# Altium PCB PCB_PS7805.PcbDoc
Units mil, origin at the board's own origin, x right, y up, seen from the top; angles counter-clockwise.
Board outline 3180 x 640 mil, 2 copper layers (Top Layer, Bottom Layer); 10 components, 5 nets, 22 pads, 1 vias.
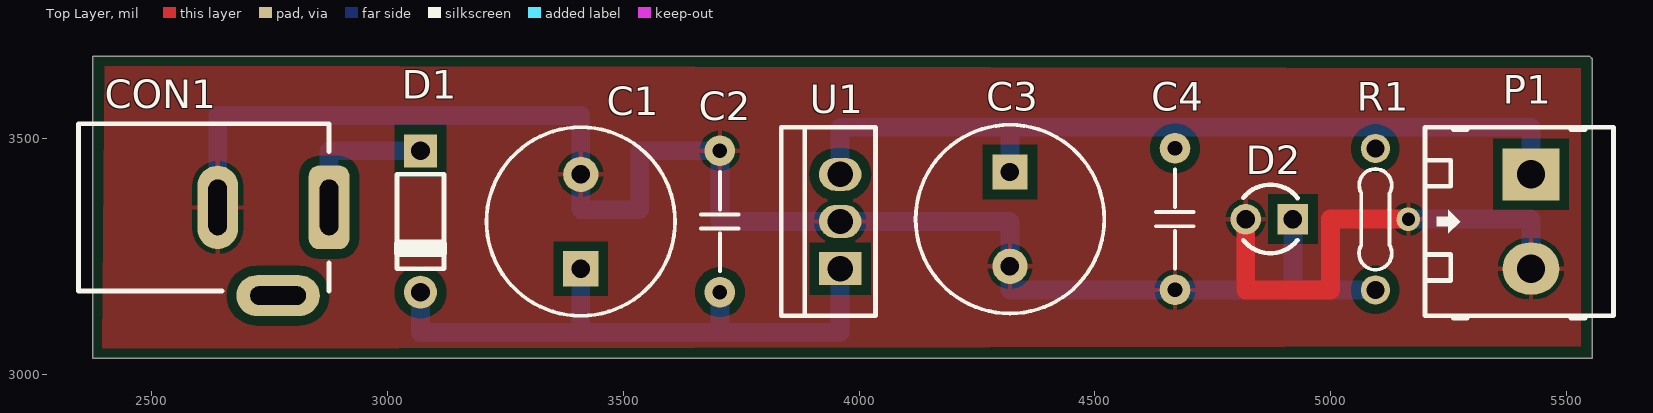
[diagram p0: Top Layer view]
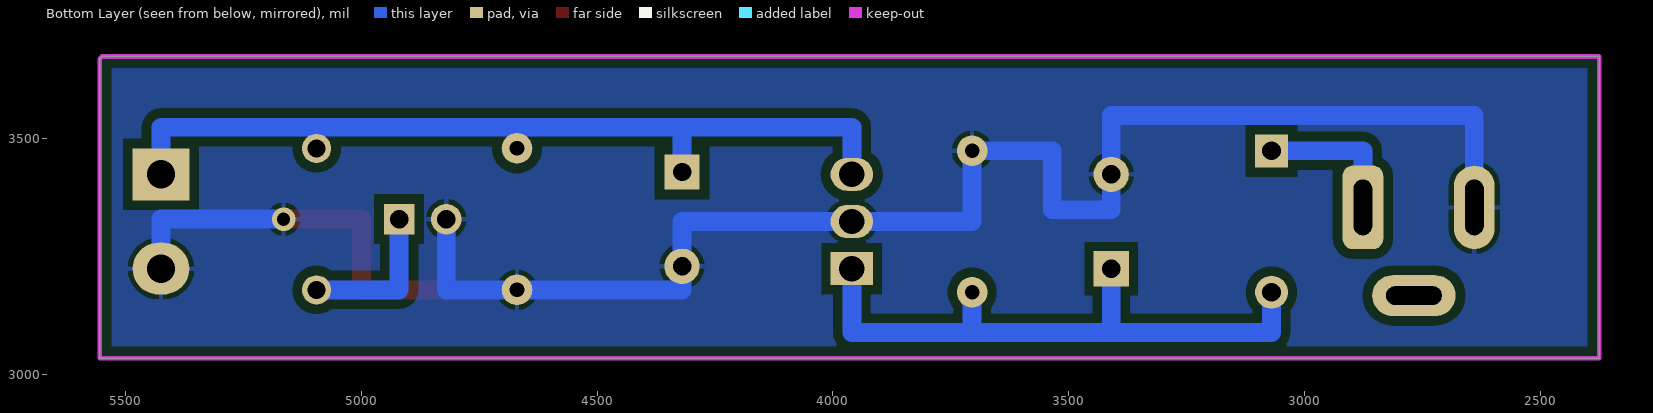
[diagram p1: Bottom Layer view, seen from below]
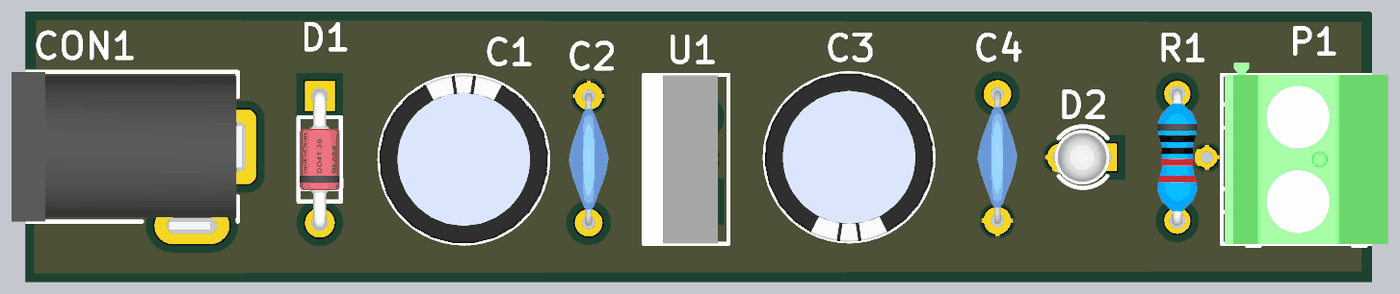
[diagram p2: 3D render of the assembled board from above, using the file's embedded part models]

## Layer stack, top to bottom
Top Solder: solder mask 0.4, Solder Resist, Dk 3.5
Top Layer: signal copper 1.4
Dielectric 1: dielectric 12.6, FR-4, Dk 4.8
Bottom Layer: signal copper 1.4
Bottom Solder: solder mask 0.4, Solder Resist, Dk 3.5

## Board outline
2375,3035 5555,3035 5555,3670 5550,3675 2375,3675

## Design rules (kind name [scope] priority, off if disabled: settings)
Clearance [All] p1: gap=20 ignorepadtopadclearanceinfootprint=FALSE
PolygonConnect [All] p1: connectstyle=Relief reliefconductorwidth=10 reliefentries=4 polygonreliefangle="90 Angle" airgapwidth=10
RoutingVias [All] p1: holewidth=28 width=50 viastyle="Through Hole" minholewidth=28 minwidth=50 maxholewidth=28 maxwidth=50
SolderMaskExpansion [All] p1: expansion=4 istentingtop=FALSE
Width [All] p1: maxlimit=100 minlimit=20 preferedwidth=40
30 further rules are at their usual default settings.

## Components (designator, comment, footprint, x,y, rotation, side; value= is the part's Value field where it differs from the comment)
C1 "1000uF" CYL/D.400/LS.200 3410,3325 r90 top
C2 "104" "CAP Ceramic/W300" 3705,3175 r90 top
C3 "1000uF" CYL/D.400/LS.200 4320,3330 r270 top
C4 "104" "CAP Ceramic/W300" 4670,3480 r270 top
CON1 "CON DC PWR" CONN/DC/PWR/5.0MM 2876.22,3355 r0 top
D1 "1N4007" DO-41 3070,3475 r270 top
D2 "Led" "LED 3MM - green" 4870,3330 r180 top
P1 "Header 2" HDR/Terminal/2 5425,3325 r270 top
R1 "1K" "R 1/4W/300" 5095,3480 r270 top
U1 "78xx" TO-220 3960,3225 r90 top

## Footprints (in the part's own frame and the unit in brackets; to place one, negate y for a bottom-side part, rotate by r counter-clockwise, add the part's x,y. Pads: shape width x height; smd on the part's side, far side on the other; paste and mask are expansions set on the pad)
"CAP Ceramic/W300" [mil]
  round 65 hole 31: 1(0,0) 2(300,0)
  silkscreen extent 45,-40 255,40, body extent -8,-47 307,47, height 340
CONN/DC/PWR/5.0MM [mm]
  rrect50% 2.2x4.5 hole 1 slot 3 at 90 deg: 1(0,0)
  oval 2.2x4.5 hole 1 slot 3 at 90 deg: 2(-6,0)
  oval 4.5x2.2 hole 1 slot 3 at 0 deg: 3(-2.75,-4.75)
  silkscreen extent -13.5,-4.5 0,4.5, body extent -13.58,-5 0.25,4.5, height 11.02
CYL/D.400/LS.200 [mil]
  rect 75x75 hole 39: 1(-100,0)
  round 75 hole 39: 2(100,0)
  silkscreen extent -200,-200 200,200, body extent -198,-199 200,199, height 500
DO-41 [mil]
  rect 70x70 hole 39.37: 1(0,0)
  round 70 hole 39.37: 2(300,0)
  silkscreen extent 50,-55 250,55, body extent -15,-47 315,47, height 99
HDR/Terminal/2 [mil] "Header 2, 2 pin, hight 400mil, Pin to Pin 200mil, Colour Green"
  rect 110x120 hole 60: 1(-100,0)
  oval 110x120 hole 60: 2(100,0)
  silkscreen extent -200,-225 205,175, body extent -229,-218 200,168, height 559
"LED 3MM - green" [mil]
  rect 65x65 hole 39: 1(-50,0)
  round 65 hole 39: 2(50,0)
  silkscreen extent -60,-73 55,72, body extent -66,-65 64,65, height 207
"R 1/4W/300" [mil] "Through hole resitor, axial 300mils, 1/4W"
  round 62 hole 38: 1(0,0) 2(300,0)
  silkscreen extent 44,-35 257,35, body extent -12,-47 312,47, height 97
TO-220 [mil]
  rect 70x90 hole 54: 1(0,0)
  oval 70x90 hole 54: 2(100,0) 3(200,0)
  silkscreen extent -100,-75 300,125, body extent -100,-50 300,130, height 730

## Part data
C1 C3: library part Capacitor, "Capacitor pol"
C2 C4: library part "Capacitor NP", "Capacitor non-pol"
CON1: "DC input connector"
D1: library part Diode, "Default Diode"
D2: "Typical LED"
P1: "Header, 2-Pin"
R1: library part Resistor, "Resistor"
U1: "LDO Fixed Voltage regulator"

## Via types
v1: diameter 50, hole 28, Top Layer to Bottom Layer, 1 vias

## Nets (pads, with @x,y where several pads share a name; then routed paths per layer and width w, separated by ;. In a path a pad name is that pad's centre, name@x,y a point inside that pad or via, vN(x,y) a via of type N, cw(c..) or ccw(c..) an arc to the next point about the centre after c; other vN are vias at no path point)
+5: C3.1 C4.1 P1.1 R1.1 U1.3 | length 1850
  Bottom Layer w40: U1.3 3960,3525 4320,3525 ; C3.1 4320,3525 ; C4.1 4670,3525 ; R1.1 5095,3525 ; P1.1 5425,3525 5095,3525 ; 4320,3525 4670,3525 ; 4670,3525 5095,3525
GND: C1.2 C2.2 C3.2 C4.2 CON1.2 D2.2 P1.2 U1.2 | length 4160
  Top Layer w40: D2.2@4815,3330 D2.2 4820,3180 5000,3180 5000,3330 v1(5165,3330)
  Bottom Layer w40: CON1.2 2640,3550 3410,3550 C1.2 3410,3350 3535,3350 3535,3475 C2.2 3705,3325 U1.2 4320,3325 C3.2 4320,3180 C4.2 4820,3180 D2.2 ; v1(5165,3330) 5425,3330 P1.2
NetC1_1: C1.1 C2.1 D1.2 U1.1 | length 1330
  Bottom Layer w40: D1.2 3070,3090 3410,3090 ; C1.1 3410,3090 ; C2.1 3705,3090 ; U1.1 3960,3090 3705,3090 ; 3410,3090 3705,3090
NetCON1_1: CON1.1 D1.1 | length 313.8
  Bottom Layer w40: CON1.1 2876.22,3475 D1.1
NetD2_1: D2.1 R1.2 | length 325
  Bottom Layer w40: D2.1 4920,3180 R1.2
pads on no net: CON1.3

## Polygon pours and split planes (outlines as drawn)
GND on Bottom Layer "GND_L02_P002" (solid, remove dead copper, pour order 2): 2375,3675 5550,3675 5555,3035 2370,3040
GND on Top Layer "GND_L01_P004" (solid, remove dead copper, pour order 4): 2400,3655 5530,3650 5530,3060 2395,3055

## Keep-outs
Bottom Layer:
  lines w10: 2375,3035 2375,3675 2425,3675 5525,3675 5550,3675 5555,3670 5555,3075 5555,3035 2412.07,3035 2375,3035